# Altium PCB Cell Characterization Board V1.2.PcbDoc (part 2 of 3)
Units mm, origin at the board's own origin, x right, y up, seen from the top; angles counter-clockwise.
Board outline 180.24 x 170.15 mm, 4 copper layers (SIG1, GND, PWR, SIG2), stack 1.746 mm thick; 142 components, 125 nets, 561 pads, 593 vias.
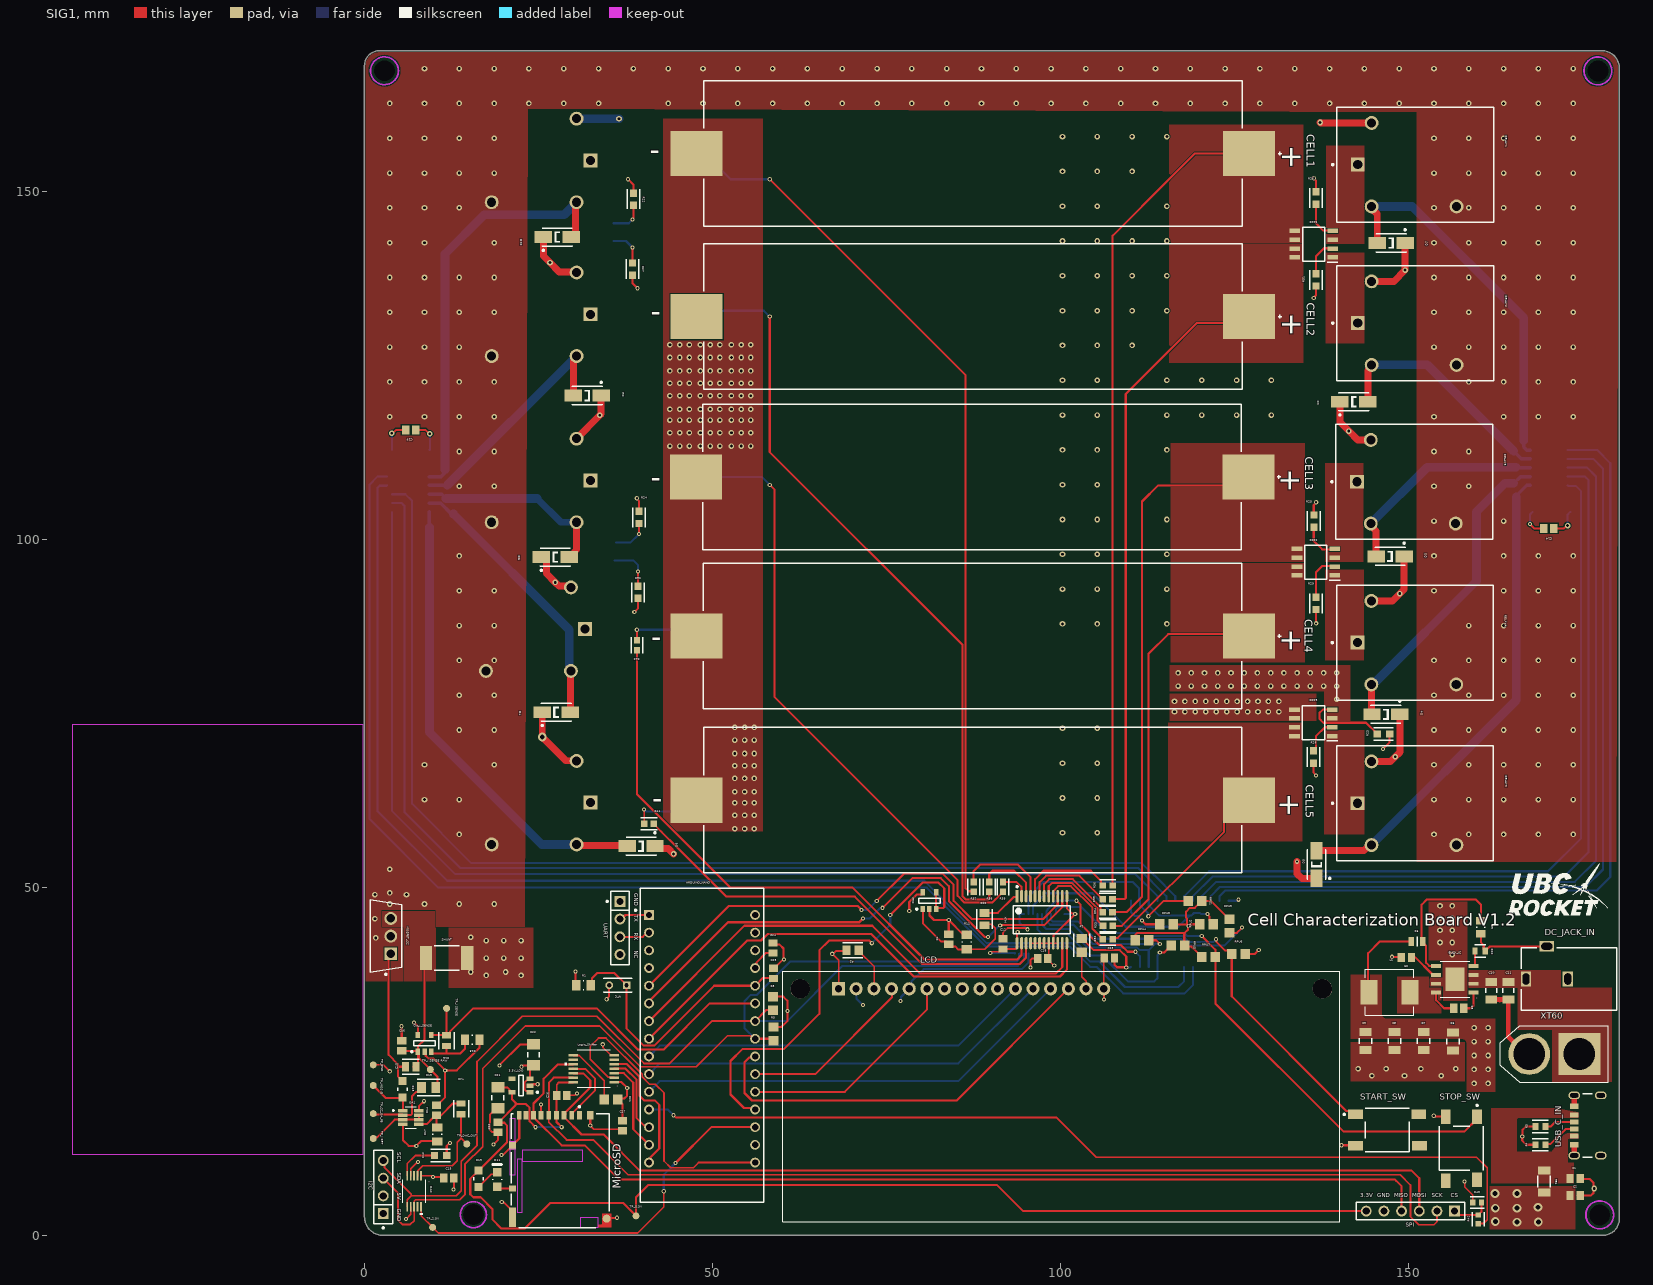
[diagram p0: SIG1 view]

## Part data (continued)
R17 R18: library part CMP-02407-000077-1, "MCU08050D2001BP500 RES 1.05K OHM 0.5% 1/5W 0805", Case/Package=0805, Max Operating Temperature=125°C, Max Power Dissipation=125mW, Min Operating Temperature=-55°C, Package Quantity=5000, Resistance=2kR, Temperature Coefficient=25ppm/°C, Tolerance=0.1%, Composition="Thin Film", Contact Plating=Tin, Depth=1.25mm, Height=0.022inch, Lead Free="Lead Free", Length=0.079inch, Military Standard=Not, Number of Terminations=2, Packaging="Tape and Reel", Radiation Hardening=No, Width=0.049inch
R20: library part CMP-02407-007717-1, "RES Thick Film, 200kΩ, 1%, 0.33W, 100ppm/°C, 0603", Case/Package=0603, Max Operating Temperature=155°C, Max Power Dissipation=250mW, Min Operating Temperature=-55°C, Package Quantity=5000, Resistance=200kR, Temperature Coefficient=100ppm/°C, Tolerance=1%, Composition="Thick Film", Depth=0.85mm, Features="Automotive AEC-Q200", Height=0.022inch, Lead Free="Lead Free", Length=0.063inch, Military Standard=Not, Number of Terminations=2, Packaging="Tape and Reel", Width=0.033inch
R32 R33 R34 R35 R36 R37 R38 R39 R40 R41: library part CMP-250906-173560-1, "TFCR0603-10W-E-2001BT"
R42: library part CMP-03211-000516-1, "CRGCQ0603F1K2", Ambient Temperature Range High=+70°C, Manufacturer="TE Connectivity", Package=CRGCQ0603, Power Rating=0.1W, Resistance=1.2KΩ, Temperature="-55°C to +155°C", Temperature Coefficient=±100ppm/°C, Temperature Range High=+155°C, Temperature Range Low=-55°C, Tolerance=0.01, Voltage Rating=75V, Category=Res, ComponentLink2Description=Datasheet, ComponentLink2URL=https://www.te.com/commerce/DocumentDelivery/DDEController?Action=showdoc&DocId=Data+Sheet%7F1773204-3%7F1%7Fpdf%7FEnglish%7FENG_DS_1773204-3_1.pdf%7F4-2176339-710, Composition="Thick Film", Device Class L1="Passive Components", Device Class L2=Resistors, Device Class L3="Chip SMD Resistors", Digikey Description="CRGCQ 0603 1K2 1%", Height=0.55mm, Ipc Land Pattern Name=RESC16080X45, Lead Free=Yes, Manufacturer Part Number=CRGCQ0603F1K2, Octopart=https://octopart.com/crgcq0603f1k2-te+connectivity-91018051, RoHS=TRUE, Series=CRGCQ
R43: library part CMP-03211-010325-1, "CRGCQ0603F2K2", Ambient Temperature Range High=+70°C, Manufacturer="TE Connectivity", Package=CRGCQ0603, Power Rating=0.1W, Resistance=2.2KΩ, Temperature="-55°C to +155°C", Temperature Coefficient=±100ppm/°C, Temperature Range High=+155°C, Temperature Range Low=-55°C, Tolerance=0.01, Voltage Rating=75V, Category=Res, ComponentLink2Description=Datasheet, ComponentLink2URL=https://www.te.com/commerce/DocumentDelivery/DDEController?Action=showdoc&DocId=Data+Sheet%7F1773204-3%7F1%7Fpdf%7FEnglish%7FENG_DS_1773204-3_1.pdf%7F4-2176339-766, Composition="Thick Film", Device Class L1="Passive Components", Device Class L2=Resistors, Device Class L3="Chip SMD Resistors", Digikey Description="CRGCQ 0603 2K2 1%", Height=0.55mm, Ipc Land Pattern Name=RESC16080X45, Lead Free=Yes, Manufacturer Part Number=CRGCQ0603F2K2, Octopart=https://octopart.com/crgcq0603f2k2-te+connectivity-91018063, RoHS=TRUE, Series=CRGCQ
RELAY1 RELAY2 RELAY3 RELAY4 RELAY5 RELAY6 RELAY7 RELAY8 RELAY9 RELAY10: library part CMP-08822-000152-1, "RELAY GEN PURPOSE SPST 10A 5V", Coil Current=79.4mA, Coil Power=400mW, Coil Resistance=63R, Coil Voltage (DC)=5V, Contact Current Rating=10A, Max Operating Temperature=85°C, Max Voltage Rating (AC)=250V, Max Voltage Rating (DC)=125V, Min Operating Temperature=-40°C, Package Quantity=500, Coil Type=Non-Latching, Contact Material=Tin, Height=19mm, Lead Free="Lead Free", Length=22.5mm, Max Current Rating=10A, Mount="Through Hole", Number of Pins=4, Operate Time=10ms, Packaging=Tray, Power Consumption=400mW, Power Rating=400mW, Relay Type="General Purpose", Release Time=5ms, RoHS Compliant=Yes, Termination=Solder, Throw Configuration=SPST, Weight=12g, Width=16.5mm
"RELAY_DRIVER 1" "RELAY_DRIVER 2": library part CMP-04912-000075-1, "MOSFET 7CH 16SOIC", Case/Package=SOIC, Collector Emitter Saturation Voltage=750mV, Collector Emitter Voltage (VCEO)=20V, Max Collector Current=140mA, Max Operating Temperature=85°C, Max Power Dissipation=860mW, Min Operating Temperature=-40°C, Output Voltage=16V, Package Quantity=1, Height=1.5mm, Lead Free="Lead Free", Length=10mm, Mount="Surface Mount", Number of Drivers=7, Number Of Outputs=7, Number of Pins=16, Output Current=140mA, Packaging="Tape and Reel", Power Dissipation=860mW, Radiation Hardening=No, REACH SVHC="No SVHC", RoHS Compliant=Yes, Series=-, Weight=0.004998oz, Width=4mm
RPP1 RPP2 RPP3 RPP4 RPP5: "Integrated Circuit", Manufacturer_Name=MCC, Datasheet Link=https://www.mccsemi.com/pdf/Products/MCQ7328(SOP-8).pdf, Height=1.75mm, Manufacturer_Part_Number=MCQ7328-TP
SHUNT: library part CMP-07231-007405-1, "RES 0.05 OHM 1% 3W 2512"
SPI: library part CMP-1024-00383-1, "0.025\" SQ Post Header, Through-hole, Vertical, -55 to 125 degC, 2.54 mm Pitch, 6-Pin, Male, RoHS", Manufacturer=Samtec, Temperature Range="-55 to 125 degC", ComponentLink1Description="Manufacturer URL", ComponentLink1URL=http://www.samtec.com, ComponentLink2Description=Datasheet, ComponentLink2URL=http://www.samtec.com/documents/webfiles/pdf/TSW_TH.PDF, ComponentLink3Description="Package Specification", ComponentLink3URL=http://www.samtec.com/documents/webfiles/cpdf/TSW-XXX-XX-XXX-X-XX-XXX-MKT.pdf, DatasheetVersion=F-214, Mounting Technology=Through-hole, Orientation=Vertical, PackageDescription=".025[0.64] SQ. Post Terminal Strip Assembly", PackageReference=TSW-106-07-X-S, PackageVersion="DM, 8/1988", PartNumber=TSW-106-07-G-S, Pitch="2.54 mm", RoHS=True
START_SW STOP_SW: library part CMP-03407-000026-1, "SWITCH TACTILE SPST-NO 0.05A 24V", RoHS Compliant=Yes
USB_C_IN: library part CMP-245163-000004-1, "CONN RCPT TYPE C 6P SMD RA"
XT60: library part CMP-002-00073-1, "Plug; DC supply; XT60; male; PIN: 2; for cable; soldered; 30A; 500V", Case/Package=Package, Check_prices=https://www.snapeda.com/parts/XT60-M/AMASS/view-part/?ref=eda, Component Type=Standard, Design Item ID=XT60-M, MF=AMASS, MP=XT60-M, Pins=2, SnapEDA_Link=https://www.snapeda.com/parts/XT60-M/AMASS/view-part/?ref=snap, Source=XT60-M.SchLib

## Free pads (board coordinates)
  round 1.524 hole 3 unplated: 1(2.87,167.28) 1(15.638,2.962) 1(177.165,167.261) 1(177.438,2.932)
  round 1 smd: GND(1.257,24.482) TP_2.5V(9.782,1.139) TP_3.3V(14.692,13.118) TP_3.3V(38.999,2.794) TP_CC_OA_FB(1.257,17.478) "TP_I SENSE"(11.794,32.605) "TP_I SENSE RAW"(9.453,23.81) "TP_I SET"(1.257,13.9) "TP_MOS G"(1.257,21.51)

## Via types
v1: diameter 0.8, hole 0.4, SIG1 to SIG2, tented both sides, 492 vias
v2: diameter 0.6, hole 0.3, SIG1 to SIG2, tented both sides, 92 vias
v3: diameter 1.27, hole 0.711, SIG1 to SIG2, tented both sides, 9 vias

## Nets (pads, with @x,y where several pads share a name; then routed paths per layer and width w, separated by ;. In a path a pad name is that pad's centre, name@x,y a point inside that pad or via, vN(x,y) a via of type N, cw(c..) or ccw(c..) an arc to the next point about the centre after c; other vN are vias at no path point)
"2.5V REF": ARDUINO_NANO.18 DAC.10 pad.TP_2.5V | length 59.3
  SIG1 w0.25: DAC.10@8.142,4.109 8.142,2.779 pad.TP_2.5V@9.782,1.139 9.803,1.139 10.617,0.325 39.247,0.325 42.989,4.067 v2(42.989,6.325)
  SIG1 w0.3: v2(44.679,10.389) 49.822,15.532 ARDUINO_NANO.18@56.109,15.532
  SIG2 w0.3: v2(42.989,6.325) 42.989,8.699 v2(44.679,10.389)
3.3V: 3.3V_LDO.5 C20.2 C21.2 C26.2 Logic_Shifter.14 MicroSD.4 pad.TP_3.3V@38.999,2.794 R19.2 SPI.6 | length 178.5
  SIG1 w0.25: C26.2@27.6,20.099 27.6,21.635 27.925,21.96 29.941,21.96 Logic_Shifter.14@29.975,21.994
  SIG1 w0.3: C20.2@19.164,16.257 19.249,16.172 20.088,16.172 20.498,15.763 20.498,13.402 R19.2@16.4,9.304 15.192,8.096 15.192,5.897 15.628,5.461 16.672,5.461 18.364,3.769 18.364,2.282 19.67,0.975 23.042,0.975 26.704,4.637 37.156,4.637 pad.TP_3.3V@38.999,2.794 38.999,5.451 40.787,7.239 90.841,7.239 94.6,3.48 SPI.6@143.891,3.48 ; C21.2@19.164,21.249 20.498,21.249 20.837,20.91 20.837,20.74 21.017,20.56 3.3V_LDO.5@21.187,20.56 21.187,19.528 21.69,19.025 ; C20.2@19.289,16.257 21.69,18.659 21.69,19.025 ; v2(24.555,15.532) 23.722,16.364 23.722,18.302 23.167,18.858 21.858,18.858 21.69,19.025 ; C26.2@27.575,20.099 MicroSD.4@27.575,17.225 27.575,16.282 v2(28.325,15.532)
  SIG2 w0.3: v2(24.555,15.532) v2(28.325,15.532)
5V: 3.3V_LDO.1 3.3V_LDO.3 "RELAY_DRIVER 1.9" "RELAY_DRIVER 2.9" ARDUINO_NANO.27 C2.2 C6.1 C7.1 C8.1 C9.1 C12.2 C14.2 C15.1 C18.2 C19.2 C22.2 C23.1 C24.2 C27.2 D1.2 D2.2 D3.2 D4.2 D5.2 D6.2 D7.2 D8.2 D9.2 D10.2 DAC.1 FB1.1 I2C.2 I2C_EXPANDER.24 L1.2 LCD.2 LINE_DECODER.24 Logic_Shifter.1 MUX.24 OA1.8 OA2.5 OA_I_SENSE.5 R1.2 R5.2 R6.2 R7.1 R8.2 R12.1 R21.2 RELAY1.5 RELAY2.5 RELAY3.5 RELAY4.5 RELAY5.5 RELAY6.5 RELAY7.5 RELAY8.5 RELAY9.5 RELAY10.5 RPU1.2 RPU2.2 RPU3.2 RPU4.2 RPU5.2 RPU6.2 RPU7.2 RPU8.1 | length 220.2
  SIG1 w0.25: DAC.1@8.142,8.541 9.607,8.541 9.782,8.367 v2(9.836,8.367) 11.338,8.367 C15.1@11.338,8.217 ; v2(89.889,40.573) 89.957,40.573 90.112,40.728 91.312,40.728 C12.2@91.712,41.128
  SIG1 w0.3: v2(7.118,30.582) 7.675,30.024 OA_I_SENSE.5@7.675,28.782 ; C19.2@7.354,115.697 8.745,115.697 9.312,115.13 v1(9.379,115.13) ; OA1.8@7.808,17.92 7.808,18.535 v2(8.539,19.266) ; R12.1@11.811,11.453 11.811,12.849 12.221,13.258 v2(12.263,13.258) ; v2(22.575,24.21) 22.629,24.21 22.828,24.409 C22.2@24.253,24.409 ; 3.3V_LDO.1@23.787,20.56 23.607,20.74 23.173,20.74 22.997,20.915 22.997,21.96 23.317,22.28 23.607,22.28 3.3V_LDO.3@23.787,22.46 23.787,23.944 C22.2@24.253,24.409 ; C22.2@24.275,24.432 C22.2@24.253,24.409 ; v2(30.313,37.892) 30.313,36.031 R1.2@30.422,35.922 ; Logic_Shifter.1@35.875,21.994 36.918,21.994 v2(37.733,21.18) 37.733,20.063 37.349,19.679 36.55,19.679 R21.2@36.4,19.529 36.4,19.479 37.075,18.804 C27.2@37.075,16.47 ; ARDUINO_NANO.27@56.109,38.392 56.322,38.605 56.322,39.213 57.657,40.548 C24.2@58.701,40.548 ; R8.2@58.701,34.287 60.159,34.287 60.739,33.708 v2(60.739,32.212) 60.739,30.772 59.881,29.914 R5.2@58.721,29.914 ; v2(78.246,46.591) 78.246,47.868 79.336,48.958 80.028,48.958 80.203,49.133 OA2.5@80.203,49.258 ; C12.2@91.712,41.128 93.542,41.128 93.732,41.318 MUX.24@93.732,41.956 93.732,43.415 93.826,43.509 v2(93.826,43.564) ; v2(95.682,38.456) 95.682,39.562 95.858,39.738 C18.2@96.679,39.738 ; R7.1@103.022,42.629 103.036,42.616 103.089,42.616 104.743,40.962 108.498,40.962 109.417,40.043 v2(109.417,38.452) 109.36,38.509 108.1,38.509 107.725,38.885 C23.1@107.725,39.84 ; RPU4.2@110.699,42.154 RPU4.2@110.699,42.378 110.74,42.419 110.74,43.153 111.015,43.429 117.749,43.429 117.749,41.748 RPU3.2@117.844,41.653 118.017,41.481 118.793,41.481 119.699,40.575 119.749,40.575 120.274,40.05 RPU7.2@120.274,40 ; RPU8.1@116.204,44.669 118.128,44.669 ; 117.844,43.456 118.311,43.923 118.311,44.41 v2(118.349,44.448) ; RPU2.2@119.974,44.679 118.634,44.679 118.403,44.448 v2(118.349,44.448) ; RPU5.2@124.257,45.39 124.207,45.39 121.553,48.044 RPU1.2@120.274,48.044 120.274,47.994 119.749,47.469 119.699,47.469 119.259,47.029 118.559,47.029 118.014,46.484 118.014,45.633 118.128,45.519 118.128,44.669 ; RPU6.2@126.527,40.403 127.856,40.403 v2(128.448,40.996) ; L1.2@144.156,34.869 144.156,40.533 145.823,42.2 R6.2@150.369,42.2 R6.2@150.471,42.2 ; v2(167.421,102.159) 168.045,101.535 C14.2@169.396,101.535 ; 118.128,44.669 v2(118.349,44.448)
  SIG1 w1: D8.2@25.404,97.415 25.768,97.415 26.118,97.065 26.118,95.065 v1(27.404,93.778) 27.92,93.263 29.455,93.263 RELAY7.5@29.646,93.071 ; D7.2@25.534,75.133 v3(25.534,71.596) 28.961,68.168 30.447,68.168 RELAY6.5@30.472,68.143 ; D10.2@25.686,143.383 25.686,140.684 v1(26.645,139.725) 27.972,138.398 30.371,138.398 RELAY9.5@30.472,138.298 ; RELAY8.5@30.472,114.423 33.782,117.733 v1(33.782,117.78) 34.004,118.002 D9.2@34.004,120.625 ; D6.2@41.726,55.905 42.076,55.555 43.632,55.555 v1(44.399,54.788) ; v2(133.965,53.67) 133.965,51.936 134.637,51.264 D5.2@136.754,51.264 ; v1(137.262,159.842) 137.316,159.788 RELAY1.5@144.673,159.788 ; D2.2@140.113,119.736 140.113,116.802 v1(141.393,115.522) 142.673,114.242 RELAY3.5@144.546,114.242 ; RELAY4.5@144.623,91.132 147.672,91.132 v1(148.714,92.174) 149.325,92.785 D3.2@149.325,97.522 ; RELAY5.5@144.648,68.061 147.385,68.061 v1(148.049,68.725) 148.714,69.39 D4.2@148.714,74.836 ; RELAY2.5@144.673,137.03 147.86,137.03 v1(149.472,138.642) D1.2@149.472,142.545
  PWR w0.254: v2(89.889,40.573) 93.565,40.573 v2(95.682,38.456)
  SIG2 w0.3: 9.329,112.801 9.379,112.851 v1(9.379,115.13) ; LCD.2@70.667,35.414 70.667,34.003 v2(71.607,33.064) ; v2(89.889,40.573) 93.357,40.573 93.407,40.523 I2C_EXPANDER.24@93.407,40.458 ; v2(109.417,38.452) 110.002,38.452 LINE_DECODER.24@110.109,38.558 ; v2(167.421,102.159) 167.421,103.538 167.794,103.911
  SIG2 w1.25: RELAY10.5@30.472,160.392 v1(36.553,160.392)
  other v1: 159.392,21.825 161.392,21.825 159.392,23.825 161.392,23.825 159.392,25.825 161.392,25.825 159.392,27.825 161.392,27.825 159.392,29.825 161.392,29.825
  other v3: 165.532,1.883 168.612,1.914 162.432,1.985 162.432,3.891 165.532,3.891 168.589,4.028 162.41,5.993 165.532,5.993
CC_OA_FB: OA1.2 pad.TP_CC_OA_FB R15.1 | length 10.3
  SIG1 w0.3: pad.TP_CC_OA_FB@1.257,17.478 1.371,17.365 5.413,17.365 OA1.2@5.508,17.27 6.643,17.27 6.833,17.46 6.833,20.017 7.375,20.56 7.551,20.56 8.173,21.182 R15.1@8.173,21.358
CELL1: RELAY1.1 RPP1.3
CELL1_SIG: CELL1.2 R36.1 RPP1.5 RPP1.6 | length 117.9
  SIG1 w0.3: R36.1@107.469,50.251 107.469,143.604 115.782,151.917 119.256,155.392 CELL1.2@127.087,155.392
CELL2: RELAY2.1 RPP1.1
CELL2_SIG: CELL2.2 R35.1 RPP1.7 RPP1.8 | length 96.7
  SIG1 w0.3: R35.1@107.444,48.287 109.171,48.287 109.347,48.463 109.347,120.853 119.516,131.022 126.143,131.022 CELL2.2@127.087,131.966
CELL3: RELAY3.1 RPP2.3
CELL3_SIG: CELL3.2 R34.1 RPP2.5 RPP2.6 | length 78.6
  SIG1 w0.3: R34.1@107.469,46.464 109.532,46.464 111.674,48.606 111.674,105.4 113.995,107.721 125.754,107.721 CELL3.2@126.96,108.928
CELL4: RELAY4.1 RPP2.1
CELL4_SIG: CELL4.2 R33.1 RPP2.7 RPP2.8 | length 57.7
  SIG1 w0.3: R33.1@107.479,44.454 108.782,44.454 112.615,48.287 112.615,83.532 115.446,86.363 126.74,86.363 CELL4.2@127.036,86.068
CELL5: RELAY5.1 RPP3.1
CELL5_SIG: CELL5.2 R32.1 RPP3.7 RPP3.8 | length 28.7
  SIG1 w0.3: R32.1@107.469,42.518 107.666,42.715 108.222,42.715 123.478,57.971 123.478,59.408 126.566,62.497 CELL5.2@127.061,62.497
CELL6: RELAY6.1 RPP3.3
  other v1: 139.665,76.986 116.865,78.886 118.765,78.886 120.665,78.886 122.565,78.886 124.465,78.886 126.365,78.886 128.265,78.886 130.165,78.886 132.065,78.886 133.965,78.886 135.865,78.886 137.765,78.886 139.665,78.886 116.865,80.786 118.765,80.786 120.665,80.786 122.565,80.786 124.465,80.786 126.365,80.786 128.265,80.786 130.165,80.786 132.065,80.786 133.965,80.786 135.865,80.786 137.765,80.786 139.665,80.786